# Altium PCB PCB2.pcbdoc
Units mil, origin at the board's own origin, x right, y up, seen from the top; angles counter-clockwise.
Board outline 2302.7 x 1892.44 mil, 2 copper layers (Top Layer, Bottom Layer); 29 components, 29 nets, 117 pads, 15 vias.
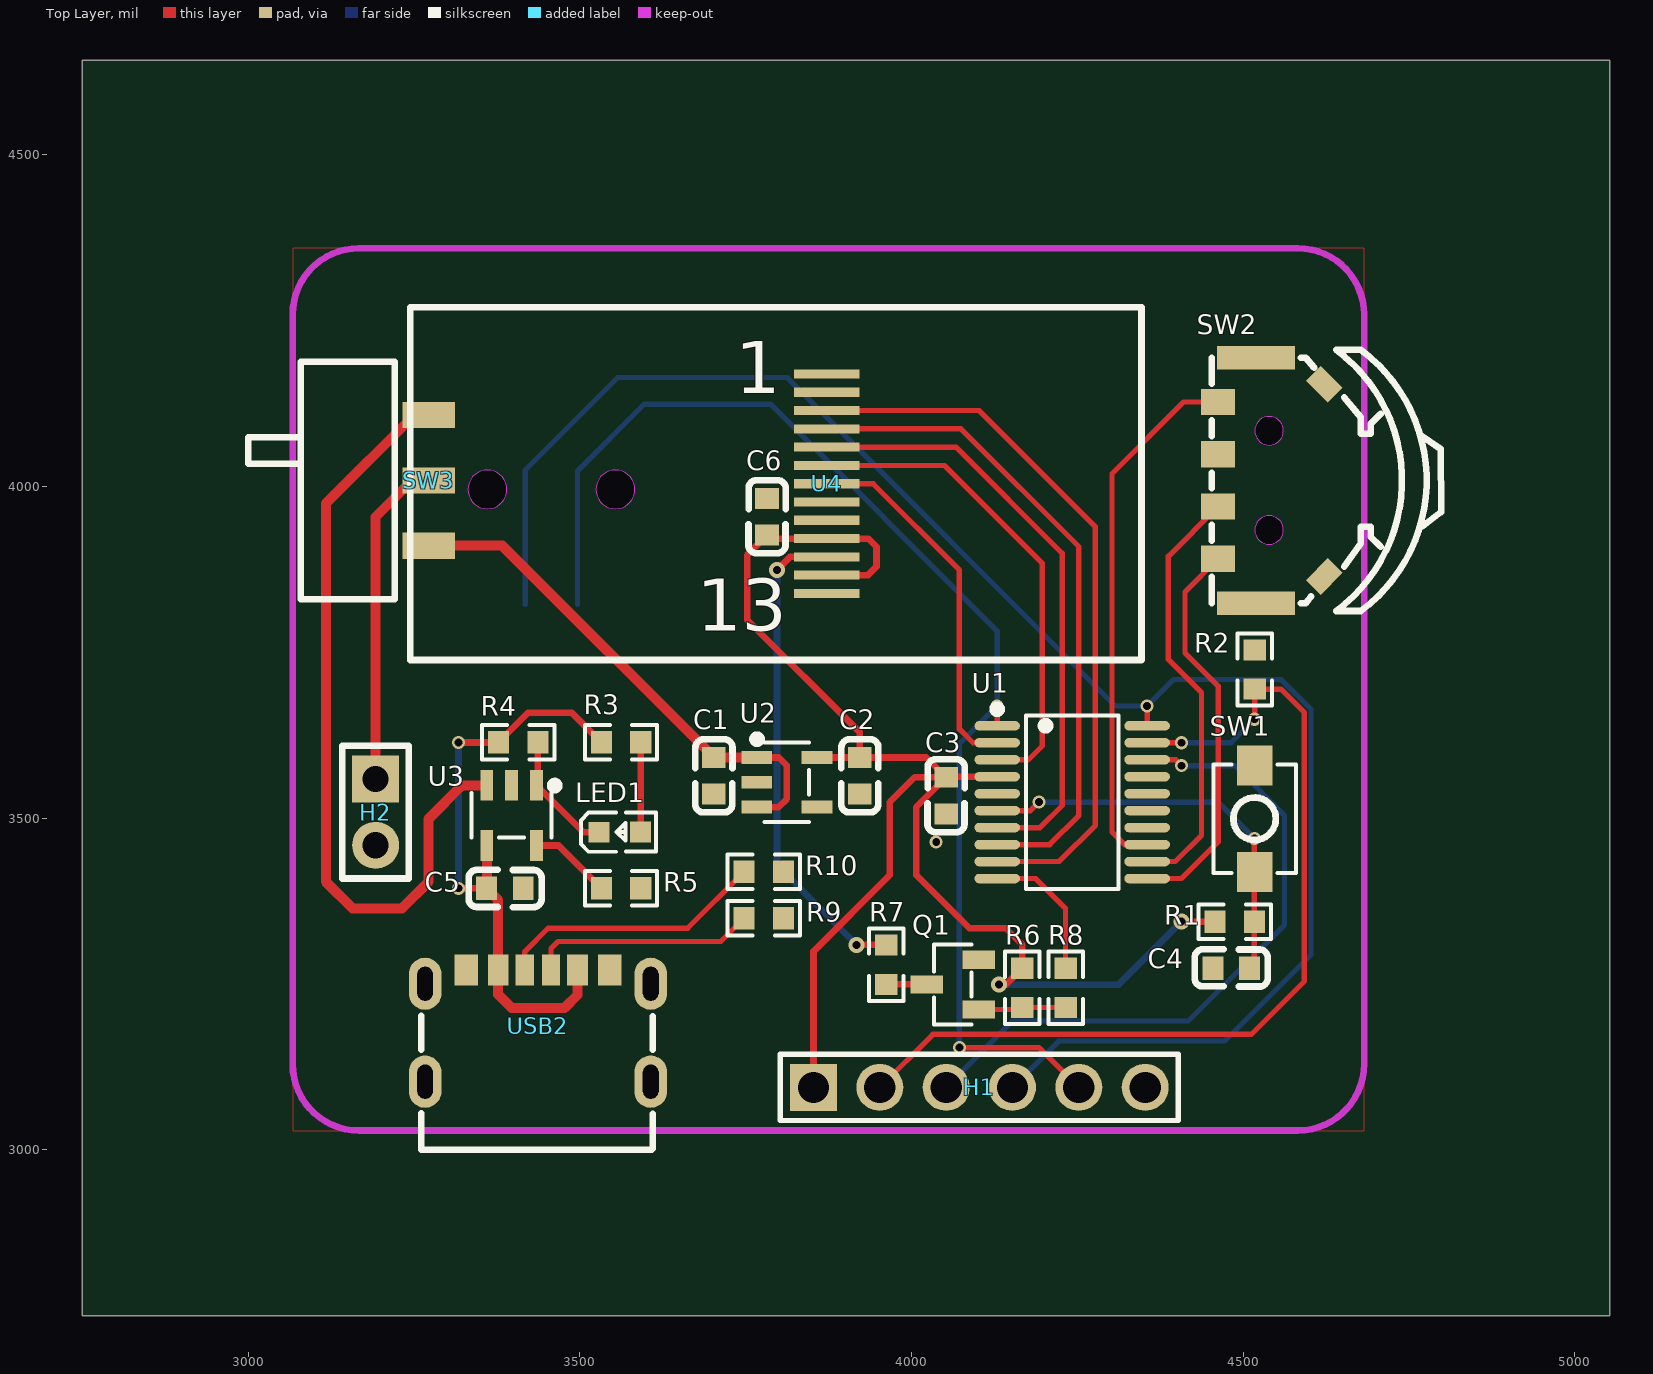
[diagram p0: Top Layer view]
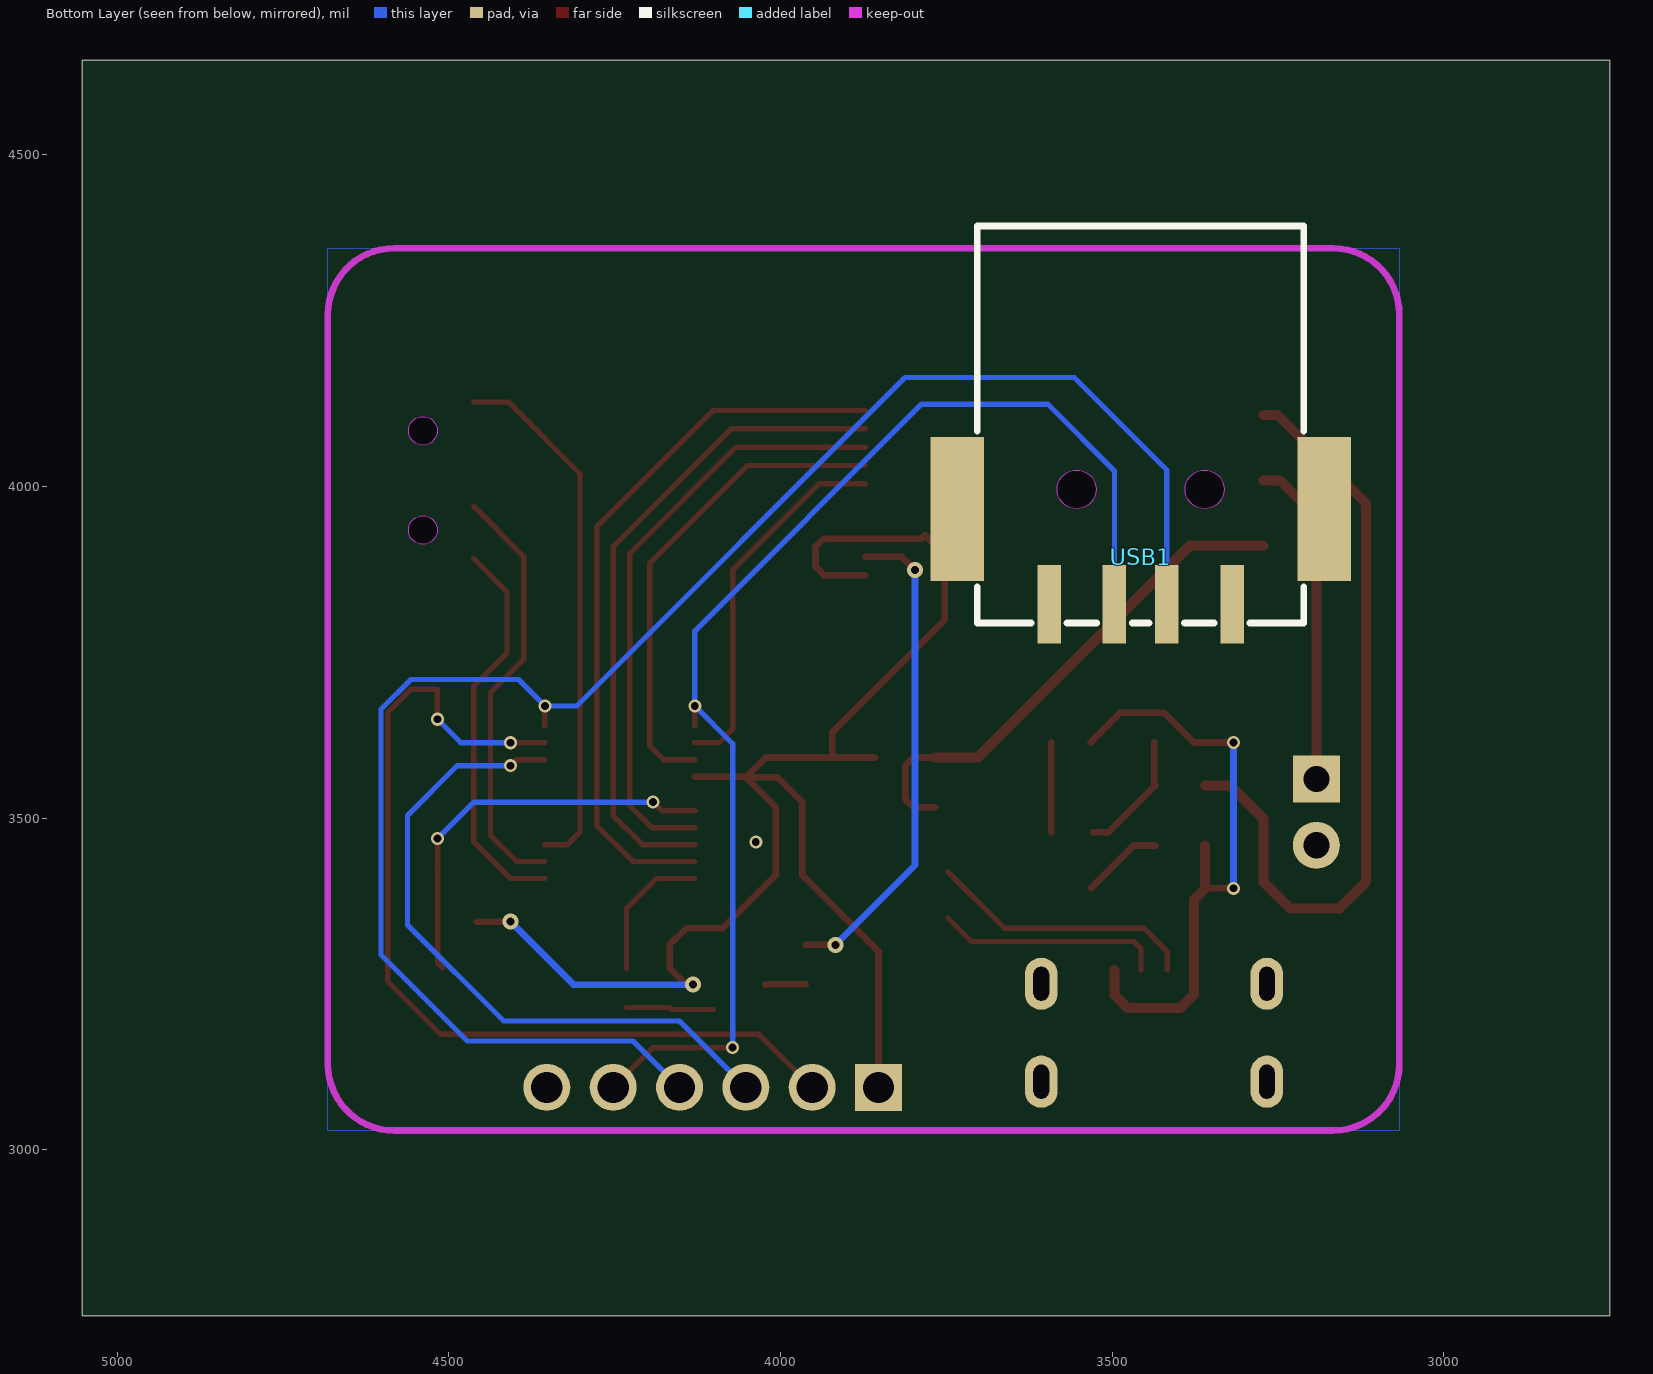
[diagram p1: Bottom Layer view, seen from below]

## Layer stack, top to bottom
Top Layer: signal copper (thickness not stored)
Dielectric: dielectric 12.6, FR-4, Dk 4.8
Bottom Layer: signal copper (thickness not stored)

## Board outline
5052.7,2750 2750,2750 2750,4642.44 5052.7,4642.44

## Components (designator, comment, footprint, x,y, rotation, side; value= is the part's Value field where it differs from the comment)
C1 "CAP_0603" C0603 3702.27,3564.01 r90 top
C2 "CAP_0603" C0603 3922.27,3564.01 r90 top
C3 "CAP_0603" C0603 4052.27,3534.01 r90 top
C4 "CAP_0603" C0603 4482.27,3274.01 r0 top
C5 "CAP_0603" C0603 3387.27,3394.01 r180 top
C6 "CAP_0603" C0603 3782.27,3954.01 r270 top
H1 "HDR-M_2.54_1x6P" HDR-TH_6P-P2.54-V-M-1 4102.27,3094.01 r0 top
H2 "HDR-M_2.54_1x2P" HDR-TH_2P-P2.54-V-M-1 3192.27,3509.01 r270 top
LED1 "LED_0603-R" LED_0603 3562.27,3479.01 r0 top
Q1 "S8050_C2891804" SOT-23-3_L2.9-W1.3-P1.90-LS2.4-BR 4062.27,3249.01 r0 top
R1 "Res_0603" R0603 4487.27,3344.01 r0 top
R2 "Res_0603" R0603 4517.27,3724.01 r90 top
R3 "Res_0603" R0603 3562.27,3614.01 r0 top
R4 "Res_0603" R0603 3407.27,3614.01 r0 top
R5 "Res_0603" R0603 3562.27,3394.01 r180 top
R6 "Res_0603" R0603 4167.27,3244.01 r90 top
R7 "Res_0603" R0603 3962.27,3279.01 r90 top
R8 "Res_0603" R0603 4232.27,3244.01 r270 top
R9 "Res_0603" R0603 3777.27,3349.01 r180 top
R10 "Res_0603" R0603 3777.27,3419.01 r0 top
SW1 "Key_SMD_3x4x2" Key_SMD_3x4x2 4517.27,3499.01 r90 top
SW2 "TM-2024A" SW-SMD_TM-2024A 4542.27,4009.01 r270 top
SW3 "SK-3245S-L1-A" SW-SMD_SK-3245S-L1-A-1 3272.27,4009.01 r90 top
U1 "STM32G030F6P6" TSSOP-20_L6.5-W4.4-P0.65-LS6.4-BL 4242.27,3524.01 r270 top
U2 "RT9013-33GB" SOT-23-5_L3.0-W1.7-P0.95-LS2.8-BL 3812.27,3554.01 r270 top
U3 "LTC4054ES5-4.2#PBF" SOT-23-5_L3.0-W1.7-P0.95-LS2.8-BL 3397.27,3504.01 r180 top
U4 "TFT显示模块 0.96寸TFT 13PIN ST7735S" N096-1608TBBIG11-H13 3872.27,4004.01 r0 top
USB1 "USB-234-BCW" USB-A-SMD_USB-234-BCW 3457.27,3894.01 r0 bottom
USB2 "USB_ Type-C-6P" "USB_ TYPE-C-6P" 3431.96,3186.86 r0 top

## Footprints (in the part's own frame and the unit in brackets; to place one, negate y for a bottom-side part, rotate by r counter-clockwise, add the part's x,y. Pads: shape width x height; smd on the part's side, far side on the other; paste and mask are expansions set on the pad)
C0603 [mm]
  rect 0.8x0.9 smd: 1(-0.7,0) 2(0.7,0)
  silkscreen extent -1.41,-0.71 1.39,0.72
HDR-TH_2P-P2.54-V-M-1 [mm]
  rect 1.8x1.8 hole 1: 1(-1.27,0)
  round 1.8 hole 1: 2(1.27,0)
  silkscreen extent -2.54,-1.27 2.54,1.27
HDR-TH_6P-P2.54-V-M-1 [mm]
  rect 1.8x1.8 hole 1.2: 1(-6.35,0)
  round 1.8 hole 1.2: 2(-3.81,0) 3(-1.27,0) 4(1.27,0) 5(3.81,0) 6(6.35,0)
  silkscreen extent -7.62,-1.27 7.62,1.27
Key_SMD_3x4x2 [mm]
  rect 1.53x1.36 smd: 1(-2.035,0) 2(2.035,0)
  silkscreen extent -2.08,-1.58 2.08,1.58
LED_0603 [mil]
  rect 31.5x31.5 smd: 1(-33.5,-0.4) 2(29.5,-0.2)
  silkscreen extent -61,-30 53,30
N096-1608TBBIG11-H13 [mm]
  rect 2.5x0.35 smd: 1(0,4.2) 2(0,3.5) 3(0,2.8) 4(0,2.1) 5(0,1.4) 6(0,0.7) 7(0,0) 8(0,-0.7) 9(0,-1.4) 10(0,-2.1) 11(0,-2.8) 12(0,-3.5) 13(0,-4.2)
  silkscreen extent -15.95,-6.75 12.05,6.75
R0603 [mil]
  rect 31.75x34.02 smd: 1(-29.66,0) 2(29.66,0)
  silkscreen extent -55,-26 55,26
SOT-23-3_L2.9-W1.3-P1.90-LS2.4-BR [mm]
  rect 1.25x0.7 smd: 1(1,-0.95) 2(1,0.95) 3(-1,0)
  silkscreen extent -0.73,-1.53 0.73,1.53
SOT-23-5_L3.0-W1.7-P0.95-LS2.8-BL [mm]
  rect 0.49x1.157 smd: 1(-0.95,-1.154) 2(0,-1.154) 3(0.95,-1.154)
  rect 0.49x1.175 smd: 4(0.95,1.154) 5(-0.95,1.154)
  silkscreen extent -1.8,-1.29 1.53,0.85
SW-SMD_SK-3245S-L1-A-1 [mm]
  rect 1x2 smd: 1(-2.5,0) 2(0,0) 3(2.5,0)
  silkscreen extent -4.55,1.29 4.55,6.9
SW-SMD_TM-2024A [mm]
  rect 1x1.3 smd: 1(-3,-2.03) 2(3,-2.03) 3(-1,-2.03) 4(1,-2.03)
  rect 0.9x3 smd: 5(-4.7,-0.58) 6(4.7,-0.58)
  rect 1.2x0.8 smd rot 45: 7(-3.68,2.03)
  rect 1.2x0.8 smd rot 135: 8(3.68,2.03)
  Multi-Layer board cut-out: 1.9,0.47 1.626,0.395 1.426,0.194 1.353,-0.08 1.426,-0.354 1.626,-0.555 1.9,-0.63 1.9,-0.63 2.173,-0.555 2.373,-0.354 2.446,-0.08 2.373,0.194 2.173,0.395 1.9,0.47
  Multi-Layer board cut-out: -1.9,0.47 -2.174,0.395 -2.373,0.194 -2.446,-0.08 -2.373,-0.354 -2.174,-0.555 -1.9,-0.63 -1.9,-0.63 -1.627,-0.555 -1.427,-0.354 -1.354,-0.08 -1.427,0.194 -1.627,0.395 -1.9,0.47
  Multi-Layer keep-out region: 1.9,0.47 1.626,0.395 1.426,0.194 1.353,-0.08 1.426,-0.354 1.626,-0.555 1.9,-0.63 1.9,-0.63 2.173,-0.555 2.373,-0.354 2.446,-0.08 2.373,0.194 2.173,0.395 1.9,0.47
  Multi-Layer keep-out region: -1.9,0.47 -2.174,0.395 -2.373,0.194 -2.446,-0.08 -2.373,-0.354 -2.174,-0.555 -1.9,-0.63 -1.9,-0.63 -1.627,-0.555 -1.427,-0.354 -1.354,-0.08 -1.427,0.194 -1.627,0.395 -1.9,0.47
  silkscreen extent -5,-2.28 5,6.5
TSSOP-20_L6.5-W4.4-P0.65-LS6.4-BL [mil]
  oval 14.33x68.58 smd: 1(-115.16,-113.03) 2(-89.57,-113.03) 3(-63.98,-113.03) 4(-38.39,-113.03) 5(-12.79,-113.03) 6(12.8,-113.03) 7(38.39,-113.03) 8(63.98,-113.03) 9(89.57,-113.03) 10(115.16,-113.03) 11(115.16,113.03) 12(89.57,113.03) 13(63.98,113.03) 14(38.39,113.03) 15(12.8,113.03) 16(-12.79,113.03) 17(-38.39,113.03) 18(-63.98,113.03) 19(-89.57,113.03) 20(-115.16,113.03)
  silkscreen extent -146,-119 131,70
USB-A-SMD_USB-234-BCW [mm]
  rect 0.9x3 smd: 1(-3.5,1.825) 2(-1,1.825) 3(1,1.825) 4(3.5,1.825)
  rect 2.05x5.5 smd: 5(-7.025,-1.825) 6(7.025,-1.825)
  Multi-Layer board cut-out: -1.7,-2.575 -1.804,-2.946 -2.078,-3.216 -2.45,-3.315 -2.822,-3.216 -3.096,-2.946 -3.2,-2.575 -3.2,-2.575 -3.096,-2.204 -2.822,-1.934 -2.45,-1.835 -2.078,-1.934 -1.804,-2.204 -1.7,-2.575
  Multi-Layer board cut-out: 3.2,-2.575 3.096,-2.946 2.822,-3.216 2.45,-3.315 2.078,-3.216 1.804,-2.946 1.7,-2.575 1.7,-2.575 1.804,-2.204 2.078,-1.934 2.45,-1.835 2.822,-1.934 3.096,-2.204 3.2,-2.575
  Multi-Layer keep-out region: -1.7,-2.575 -1.804,-2.946 -2.078,-3.216 -2.45,-3.315 -2.822,-3.216 -3.096,-2.946 -3.2,-2.575 -3.2,-2.575 -3.096,-2.204 -2.822,-1.934 -2.45,-1.835 -2.078,-1.934 -1.804,-2.204 -1.7,-2.575
  Multi-Layer keep-out region: 3.2,-2.575 3.096,-2.946 2.822,-3.216 2.45,-3.315 2.078,-3.216 1.804,-2.946 1.7,-2.575 1.7,-2.575 1.804,-2.204 2.078,-1.934 2.45,-1.835 2.822,-1.934 3.096,-2.204 3.2,-2.575
  silkscreen extent -6.25,-12.66 6.25,2.54
"USB_ TYPE-C-6P" [mm]
  oval 1.25x2 hole 0.6 slot 1.3 at 90 deg: 7(-4.193,1.611) 8(4.447,1.611) 9(-4.193,-2.139) 10(4.447,-2.139)
  rect 0.7x1.2 smd: A5(-0.373,2.139) B5(0.627,2.139)
  rect 0.8x1.2 smd: A9(1.647,2.139) B9(-1.393,2.139)
  rect 0.9x1.2 smd: A12(2.877,2.139) B12(-2.623,2.139)
  silkscreen extent -4.34,-4.75 4.52,0.39

## Via types
v1: diameter 19.68, hole 11.81, Top Layer to Bottom Layer, 11 vias
v2: diameter 24.02, hole 12.01, Top Layer to Bottom Layer, 4 vias

## Nets (pads, with @x,y where several pads share a name; then routed paths per layer and width w, separated by ;. In a path a pad name is that pad's centre, name@x,y a point inside that pad or via, vN(x,y) a via of type N, cw(c..) or ccw(c..) an arc to the next point about the centre after c; other vN are vias at no path point)
$1N438: Q1.3 R7.1 | length 60.8
  Top Layer w10: R7.1 4022.56,3249.35 Q1.3
$1N441: R7.2 U4.11 | length 743
  Top Layer w10: v2(3797.27,3874.01) 3817.04,3893.77 U4.11 ; v2(3917.27,3309.01) 3961.93,3309.01 R7.2
  Bottom Layer w10: v2(3797.27,3874.01) 3797.27,3429.01 v2(3917.27,3309.01)
$1N3309: Q1.1 R6.1 R8.2 | length 131.8
  Top Layer w8: Q1.1 4164.53,3211.61 R6.1 R8.2
$1N4191: R9.2 USB2.B5 | length 342.2
  Top Layer w8: USB2.B5 3456.65,3303.38 3467.27,3314.01 3712.61,3314.01 R9.2
$1N4196: R10.1 USB2.A5 | length 408
  Top Layer w8: USB2.A5 3417.28,3299.01 3452.27,3334.01 3662.61,3334.01 R10.1
$1N5747: SW3.3 U3.3 | length 1171.9
  Top Layer w15: SW3.3 3250.7,4107.43 3117.27,3974.01 3117.27,3404.01 3157.27,3364.01 3232.27,3364.01 3272.27,3404.01 3272.27,3499.01 3322.69,3549.43 U3.3
$1N5751: R5.2 U3.5 | length 124.7
  Top Layer w10: U3.5 3468.03,3458.59 R5.2
$1N5752: LED1.2 R3.2 | length 135.3
  Top Layer w10: LED1.2 3591.77,3613.85 R3.2
$1N5753: LED1.1 R4.2 U3.1 | length 189
  Top Layer w10: R4.2 3436.93,3551.69 U3.1 3505.49,3478.61 LED1.1
$1N5756: H2.1 SW3.2 | length 497.8
  Top Layer w15: H2.1 3192.27,3954.01 3247.27,4009 SW3.2
+5V: C5.2 R3.1 R4.1 U3.4 USB2.A9 USB2.B9 | length 920.6
  Top Layer w10: v1(3317.27,3394.17) C5.2@3359.87,3394.17 ; v1(3317.27,3614.01) R4.1 3377.61,3614.35 3422.27,3659.01 3487.61,3659.01 R3.1
  Top Layer w15: U3.4 3359.87,3394.17 C5.2 3377.12,3376.6 USB2.B9 3377.12,3234.16 3397.27,3214.01 3477.27,3214.01 3496.8,3233.53 USB2.A9
  Bottom Layer w10: v1(3317.27,3394.17) v1(3317.27,3614.01)
GND: C1.1 C2.1 C3.1 C4.1 C5.1 C6.1 H1.6 H2.2 Q1.2 R2.2 R5.1 R9.1 R10.2 SW1.2 SW2.3 U1.5 U2.2 U3.2 U4.8 U4.13 USB1.4 USB1.5 USB1.6 USB2.A12 USB2.B12
  other v1: 4037.27,3464.01
IPS_BLK: R8.1 U1.10 | length 212.1
  Top Layer w8: U1.10 4129.4,3409.01 4187.27,3409.01 4232.27,3364.01 R8.1
IPS_CS: U1.2 U4.7 | length 559.3
  Top Layer w8: U4.7 3942.27,4004.01 4072.27,3874.01 4072.27,3634.01 4092.7,3613.58 U1.2
IPS_DC: U1.7 U4.5 | length 913.2
  Top Layer w8: U4.5 4067.15,4059.13 4227.27,3899.01 4227.27,3519.01 4193.88,3485.62 U1.7
IPS_RES: U1.3 U4.6 | length 737.9
  Top Layer w8: U4.6 4049.71,4031.57 4197.27,3884.01 4197.27,3609.01 4176.25,3587.99 U1.3
IPS_SCL: U1.8 U4.4 | length 999.8
  Top Layer w8: U4.4 4074.6,4086.69 4252.27,3909.01 4252.27,3504.01 4208.29,3460.03 U1.8
IPS_SDA: U1.9 U4.3 | length 1098.2
  Top Layer w8: U4.3 4102.04,4114.24 4277.27,3939.01 4277.27,3489.01 4222.7,3434.44 U1.9
MCU_NRST: C4.2 R1.2 SW1.1 U1.6 | length 614.2
  Top Layer w8: U1.6 4179.47,3511.21 v1(4192.27,3524.01) ; C4.2 4516.93,3281.11 R1.2 SW1.1@4516.93,3418.55 ; v1(4516.93,3469.01) SW1.1@4516.93,3418.55 ; SW1.1 SW1.1@4516.93,3418.55
  Bottom Layer w8: v1(4192.27,3524.01) 4461.93,3524.01 v1(4516.93,3469.01)
SW_DN: SW2.2 U1.11 | length 598.2
  Top Layer w8: U1.11 4407.11,3408.85 4462.34,3464.08 4462.34,3698.94 4412.27,3749.01 4412.27,3840.83 SW2.2
SW_OK: SW2.4 U1.12 | length 645.8
  Top Layer w8: U1.12 4397.7,3434.44 4437.27,3474.01 4437.27,3689.01 4387.27,3739.01 4387.27,3894.58 SW2.4
SW_UP: SW2.1 U1.13 | length 805.7
  Top Layer w8: U1.13 4321.25,3460.03 4302.27,3479.01 4302.27,4019.01 4410.38,4127.12 SW2.1
SWCLK: H1.2 R2.1 U1.19 | length 1422.9
  Top Layer w8: H1.2 4032.27,3174.01 4512.27,3174.01 4592.27,3254.01 4592.27,3659.01 4556.93,3694.35 R2.1 v1(4517.27,3649.01) ; U1.19 v1(4407.27,3613.58)
  Bottom Layer w8: v1(4407.27,3613.58) 4481.84,3613.58 v1(4517.27,3649.01)
SWDIO: H1.3 U1.18 | length 1018.2
  Top Layer w8: U1.18 4398.29,3587.99 v1(4407.27,3579.01)
  Bottom Layer w8: H1.3 4152.27,3194.01 4417.27,3194.01 4562.27,3339.01 4562.27,3504.01 4487.27,3579.01 v1(4407.27,3579.01)
UART_RX: H1.5 U1.1 USB1.3 | length 1903.5
  Top Layer w8: v1(4072.27,3154.01) 4192.27,3154.01 H1.5 ; U1.1 v1(4129.24,3669.01)
  Bottom Layer w8: USB1.3 3496.64,4023.38 3597.27,4124.01 3787.27,4124.01 4129.24,3782.04 v1(4129.24,3669.01) 4072.27,3612.04 v1(4072.27,3154.01)
UART_TX: H1.4 U1.20 USB1.2 | length 2617.5
  Top Layer w8: U1.20 v1(4355.3,3669.01)
  Bottom Layer w8: USB1.2 3417.9,4024.64 3557.27,4164.01 3812.27,4164.01 4307.27,3669.01 v1(4355.3,3669.01) 4395.3,3709.01 4557.27,3709.01 4602.27,3664.01 4602.27,3294.01 4472.27,3164.01 4222.27,3164.01 H1.4
VBAT: C1.2 SW3.1 U2.1 U2.3 | length 777.9
  Top Layer w10: U2.3 3799.87,3516.61 3812.27,3529.01 3812.27,3579.01 3799.87,3591.41 U2.1
  Top Layer w15: SW3.1 3383.26,3910.58 C1.2 3766.69,3591.57 U2.1
VCC: C2.2 C3.2 C6.2 H1.1 R1.1 R6.2 U1.4 U2.5 U4.10 U4.12 | length 2377.9
  Top Layer w10: H1.1 3852.27,3299.01 3967.27,3414.01 3967.27,3524.01 4004.83,3561.57 C3.2 ; U2.5 C2.2@3922.11,3591.41 ; U4.12 3934.48,3866.21 3947.27,3879.01 3947.27,3909.01 3934.95,3921.33 U4.10 3787.39,3921.33 C6.2 3752.27,3896.45 3752.27,3799.01 3922.27,3629.01 C2.2 C2.2@3922.11,3591.41 ; U1.4 4053.1,3562.4 C3.2 ; v2(4132.27,3249.01) 4142.61,3249.01 R6.2 4167.27,3309.01 4142.27,3334.01 4087.27,3334.01 4007.27,3414.01 4007.27,3516.57 C3.2 ; v2(4407.27,3344.01) R1.1 ; C2.2@3922.11,3591.41 4022.43,3591.41 C3.2
  Bottom Layer w10: v2(4132.27,3249.01) 4312.27,3249.01 v2(4407.27,3344.01)
"": SW2.5 SW2.6 SW2.7 SW2.8 U1.14 U1.15 U1.16 U1.17 U2.4 U4.1 U4.2 U4.9 USB1.1 USB2.7 USB2.8 USB2.9 USB2.10

## Polygon pours and split planes (outlines as drawn)
GND on Bottom Layer (solid, remove dead copper, pour order 0): 3067.27,3029.01 4682.27,3029.01 4682.27,4359.01 3067.27,4359.01
GND on Top Layer (solid, remove dead copper, pour order 1): 3067.27,3029.01 4682.27,3029.01 4682.27,4359.01 3067.27,4359.01

## Keep-outs
Board Outline Layer:
  lines w10 net "": 3067.27,3129.01 ccw(c3167.27,3129.01) 3167.27,3029.01 4582.27,3029.01 ccw(c4582.27,3129.01) 4682.27,3129.01 4682.27,4259.01 ccw(c4582.27,4259.01) 4582.27,4359.01 3167.27,4359.01 ccw(c3167.27,4259.01) 3067.27,4259.01 3067.27,3129.01

## Text inside footprints (layer, text, board x,y; h text height)
U4: Top Silkscreen Layer "1" at 3734.48,4140.6 h78.45; Top Silkscreen Layer "13" at 3676.13,3782.62 h77.88